# EAGLE board HeadphoneSlice (EAGLE 7.5.0)
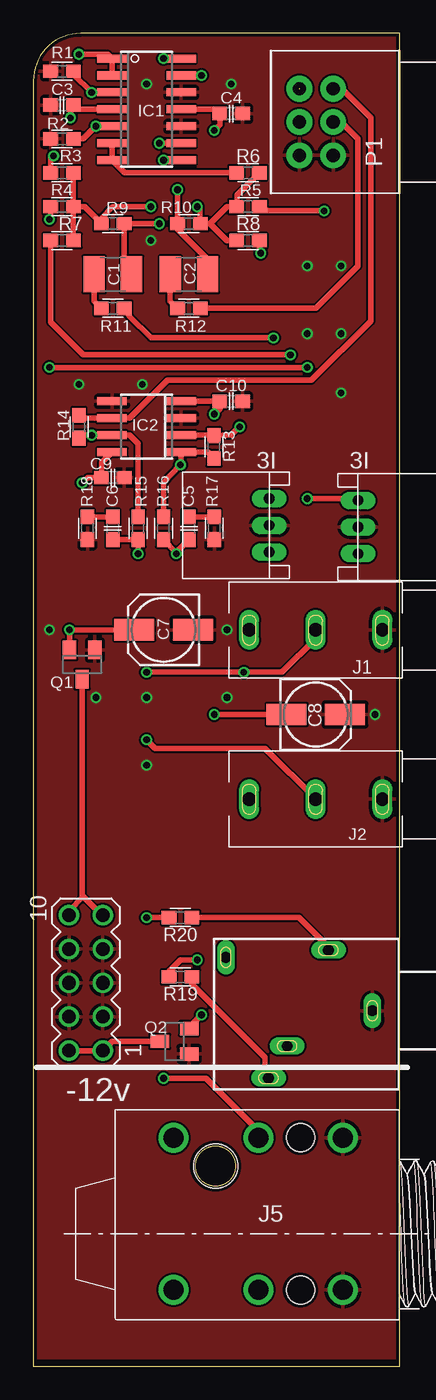
[diagram p0: board, top side]
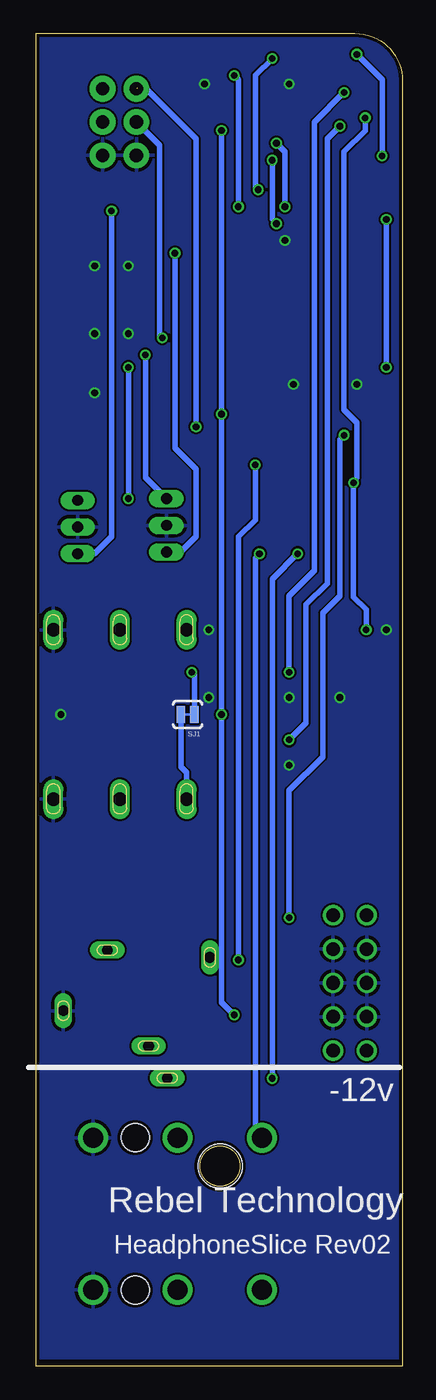
[diagram p1: board, bottom side, seen from below]

Size 27.51 x 100 mm. Coordinates in mm from the lower left corner, seen from the top.
Outline: 27.51,0 27.51,100 3.56,100 arc90 0,96.44 0,0 27.51,0
Copper layers (1*16): Top 0.035mm / dielectric 1.5mm / Bottom 0.035mm
Design rules "SeeedStudio_2layer_DRU_no_angle_20140221": minimum track width 6mil, minimum drill 12mil, track to track 6mil, track to pad 6mil, pad to pad 6mil, via to via 6mil, smd to smd 0mil, copper to edge 10mil, drill to drill 10mil, minimum pad ring 10mil, minimum via ring 6mil, stop-mask expansion 2mil, vias tented up to drill 100mil, thermal gap 10mil

## Footprints (pad centres in the part's own frame; a part is rotated, then mirrored left to right if it is on the bottom)
C1210 = smd 1.6 x 2.7: 1 -1.4,0; 2 1.4,0
C0603 = smd 1.1 x 1: 1 -0.85,0; 2 0.85,0
153CLV-0505 = smd 3 x 1.6: + 2.2,0; - -2.2,0
SO14 = smd 0.6 x 2.2: 1 -3.81,-2.6; 2 -2.54,-2.6; 3 -1.27,-2.6; 4 0,-2.6; 5 1.27,-2.6; 6 2.54,-2.6; 7 3.81,-2.6; 8 3.81,2.6; 9 2.54,2.6; 10 1.27,2.6; 11 0,2.6; 12 -1.27,2.6; 13 -2.54,2.6; 14 -3.81,2.6
SO08 = smd 0.6 x 2.2: 1 -1.905,-2.6; 2 -0.635,-2.6; 3 0.635,-2.6; 4 1.905,-2.6; 5 1.905,2.6; 6 0.635,2.6; 7 -0.635,2.6; 8 -1.905,2.6
UJ-3502-R-SLOT = drill 1 long: P$1 0,0; P$2 0,5; P$3 0,-5
CON-JST_PH_3W = drill 0.8 long: P1 0,0; P2 -2,0; P3 -4,0
NRJ6HF = drill 1.5: R 0,6.35; RN 0,-5.08; S 6.35,6.35; SN 6.35,-5.08; T -6.35,6.35; TN -6.35,-5.08 | hole 2.1: 3.175,6.35; 3.175,-5.08 | hole 3.3: -3.2,4.219
POT-BOURNS-PTD902 = drill 1 pad 1.93: 1 -2.5,-0.036; 2 0,-0.036; 3 2.5,-0.036; 4 -2.5,2.5; 5 0,2.5; 6 2.5,2.5
SOT23 = smd 1 x 1.4: 1 -0.95,-1.1; 2 0.95,-1.1; 3 0,1.1
0603 = smd 1.1 x 1: 1 -0.85,0; 2 0.85,0
SJ_2S-TRACE = smd 0.635 x 1.27: 1 -0.508,0; 2 0.508,0
MA05-2 = drill 1.016: 1 -5.08,-1.27; 2 -5.08,1.27; 3 -2.54,-1.27; 4 -2.54,1.27; 5 0,-1.27; 6 0,1.27; 7 2.54,-1.27; 8 2.54,1.27; 9 5.08,-1.27; 10 5.08,1.27
1503_09 = drill 0.8 pad 1.2 long: 1 0,-2.1; 2 -4.55,-5.4; 3 5.05,-9.9; 4 -4,-13.1; 5 2.65,-8.5

## Placement (x,y rotation side)
C1  1u Polyester  [C1210]  5.97,81.92 180 top
C2  1u Polyester  [C1210]  11.68,81.92 180 top
C3  100n  [C0603]  2.16,94.61 180 top
C4  100n  [C0603]  14.86,93.98 0 top
C5  47n  [C0603]  11.68,62.87 90 top
C6  47n  [C0603]  5.97,62.87 90 top
C7  10u  [153CLV-0505]  9.78,55.24 180 top
C8  10u  [153CLV-0505]  21.21,48.9 0 top
C9  100n  [C0603]  5.97,66.67 0 top
C10  100n  [C0603]  14.86,72.39 0 top
IC1  QUAD_OPAMPD  [SO14]  8.51,94.3 270 top
IC2  RC4560  [SO08]  8.51,70.48 90 top
J1  JACK-UJ-3502-RSLOT  [UJ-3502-R-SLOT]  21.21,55.24 90 top
J2  JACK-UJ-3502-RSLOT  [UJ-3502-R-SLOT]  21.21,42.55 90 top
J3  CON-JST_PH_3W  [CON-JST_PH_3W]  24.38,60.96 270 top
J4  CON-JST_PH_3W  [CON-JST_PH_3W]  17.72,65.09 90 top
J5  NEUTRIK_NRJ6HFSTD  [NRJ6HF]  16.89,10.79 0 top
P1  POT-BOURNS-PTD902  [POT-BOURNS-PTD902]  22.48,93.34 90 top
Q1  SI2309CDS  [SOT23]  3.67,52.64 180 top
Q2  BSS123  [SOT23]  10.6,24.37 90 top
R1  1M  [0603]  2.16,97.16 180 top
R2  1M  [0603]  2.16,92.08 180 top
R3  100k  [0603]  2.16,89.53 180 top
R4  100k  [0603]  2.16,87 180 top
R5  100k  [0603]  16.13,87 0 top
R6  100k  [0603]  16.13,89.53 180 top
R7  100k  [0603]  2.16,84.45 0 top
R8  100k  [0603]  16.13,84.45 0 top
R9  200k  [0603]  5.97,85.72 0 top
R10  200k  [0603]  11.68,85.72 180 top
R11  22k  [0603]  5.97,79.38 180 top
R12  22k  [0603]  11.68,79.38 180 top
R13  10k  [0603]  13.57,68.97 90 top
R14  10k  [0603]  3.43,70.48 90 top
R15  22R  [0603]  7.87,62.87 90 top
R16  22R  [0603]  9.78,62.87 90 top
R17  10R  [0603]  13.59,62.87 90 top
R18  10R  [0603]  4.06,62.87 90 top
R19  100R  [0603]  11.05,29.21 180 top
R20  100R  [0603]  11.05,33.66 180 top
SJ1  SOLDERJUMPERTRACE  [SJ_2S-TRACE]  16.13,48.9 180 bottom
SV1  [MA05-2]  3.95,28.75 90 top
X1  1503_09  [1503_09]  27.56,26.67 270 top

## Library data of the parts
C1-C6 C9 C10 J1-J4 P1 R1-R20 = Rebel
C7 C8 = rcl
IC1 = adafruit
IC2 = linear
J5 = neutrik_jacks
Q1 Q2 = transistor-small-signal
SJ1 = SparkFun
SV1 = con-lstb; OC_FARNELL: unknown; OC_NEWARK: unknown
X1 = con-lumberg; OC_FARNELL: 1243244; OC_NEWARK: unknown

## Nets
+12V: C3.1 C7.+ C9.1 IC1.4 IC2.8 Q1.2
-12V: C4.1 C8.- C10.1 IC1.11 IC2.4 Q2.2
BUS_IN_L: J3.P3 R4.2
BUS_IN_R: J3.P1 R5.2
GND: C3.2 C4.2 C7.- C8.+ C9.2 C10.2 IC1.10 IC1.12 IC2.3 IC2.5 J1.P$3 J2.P$3 J3.P2 J4.P2 J5.S J5.SN P1.1 P1.4 Q1.1 Q2.1 R1.2 R2.2 R17.1 R18.1 SV1.3 SV1.4 SV1.5 SV1.6 SV1.7 SV1.8 X1.1
HP_L: C5.1 J5.T R16.1
HP_R: C6.1 J5.R R15.1
IN_B1: J2.P$2 SJ1.2
IN_L: IC1.3 J1.P$1 R1.1 SJ1.1
IN_R: IC1.5 J2.P$1 R2.1
LINE_L: R19.1 X1.3
LINE_R: R20.1 X1.2
N$1: Q2.3 SV1.1 SV1.2
N$2: IC2.7 R14.1 R15.2 R20.2
N$3: IC2.2 P1.6 R13.2
N$4: C2.2 R12.2
N$5: P1.5 R11.1
N$6: P1.2 R12.1
N$7: C2.1 IC1.14 R10.2
N$8: C1.2 R11.2
N$10: C1.1 IC1.8 R9.2
N$11: IC1.6 IC1.7 R6.2
N$12: C6.2 R18.2
N$13: IC1.1 IC1.2 R3.2
N$14: Q1.3 SV1.9 SV1.10
N$16: IC2.6 P1.3 R14.2
N$19: IC2.1 R13.1 R16.2 R19.2
N$20: J4.P1 R7.1
N$21: C5.2 R17.2
N$22: J4.P3 R8.2
N$45: IC1.13 R5.1 R6.1 R8.1 R10.1
N$50: IC1.9 R3.1 R4.1 R7.2 R9.1

## Tracks (layer width: path | path; a pad name or v marks a point on that pad's centre or on a via)
+12V  (via drill 0.5)
  Top 0.406: Q1.2 v2.72,55.24 C7.+ | IC2.8 5.12,67.79 C9.1 4.06,66.67 v3.67,66.28 | IC1.4 3.33,94.3 C3.1 2.79,94.4 v2.79,93.66
  Bottom 0.406: v2.79,93.66 2.79,92.71 4.38,91.12 4.38,71.75 3.43,70.8 3.43,66.67 v3.67,66.28 3.67,57.71 2.72,56.76 v2.72,55.24
-12V  (via drill 0.5)
  Top 0.406: IC2.4 C10.1 14.01,71.86 v13.59,71.44 | Q2.2 11.7,25.42 v12.64,26.35 | C8.- v13.59,48.9 | IC1.11 13.69,94.3 C4.1 14.01,93.13 v13.59,92.71
  Bottom 0.406: v13.59,92.71 v13.59,71.44 v13.59,48.9 13.59,27.3 v12.64,26.35
BUS_IN_L  (via drill 0.5)
  Top 0.406: R4.2 1.31,86.14 v1.21,86.04 | v1.21,74.93 v20.57,74.93 | v20.57,65.09 24.26,65.09 J3.P3
  Bottom 0.406: v1.21,74.93 v1.21,86.04 | v20.57,74.93 v20.57,65.09
BUS_IN_R  (via drill 0.5)
  Top 0.406: v21.84,86.68 17.61,86.68 R5.2
  Bottom 0.406: v21.84,86.68 21.84,62.23 23.11,60.96 J3.P1
GND  (via drill 0.5)
  other vias: 8.51,45.09 4.7,50.16 14.54,55.24 8.83,84.45 20.57,77.47 1.21,55.24 20.57,82.55 3.43,73.66 8.51,50.16 14.54,50.16 25.65,48.9 8.19,73.66 8.51,96.2 23.11,77.47 23.11,73.03 23.11,82.55 14.86,96.2
  pour Bottom: -9.27,0.64 35.18,0.64 35.18,100.97 -9.27,100.97
  pour Top: -8,0.64 36.45,0.64 36.45,100.97 -8,100.97
HP_L  (via drill 0.5)
  Top 0.406: v10.73,60.96 10.73,61.06 | 10.73,61.06 R16.1 | 10.73,61.06 C5.1
  Bottom 0.406: v10.73,60.96 11.05,60.64 11.05,17.78 10.54,17.27 J5.T
HP_R  (via drill 0.5)
  Top 0.406: C6.1 R15.1 v7.87,60.96 | J5.R 16.89,17.65 12.95,21.59 v9.78,21.59
  Bottom 0.406: v7.87,60.96 9.78,59.05 v9.78,21.59
IN_B1
  Bottom 0.406: SJ1.2 16.64,44.96 16.21,44.53 J2.P$2
IN_L  (via drill 0.5)
  Top 0.406: R1.1 3.01,96.94 v4.38,95.57 IC1.3 | v8.51,52.07 v15.81,52.07 18.67,52.07 21.21,54.61 J1.P$1
  Bottom 0.406: v8.51,52.07 8.51,57.78 6.6,59.69 6.6,93.34 v4.38,95.57 | SJ1.1 15.62,51.88 v15.81,52.07
IN_R  (via drill 0.5)
  Top 0.406: R2.1 3.75,92.08 v4.7,93.03 IC1.5 | v8.51,46.99 9.14,46.35 17.4,46.35 J2.P$1
  Bottom 0.406: v8.51,46.99 7.24,48.26 7.24,57.15 5.65,58.74 5.65,92.08 v4.7,93.03
LINE_L
  Top 0.406: 11.9,29 R19.1 11.9,28.68 17.4,23.18 17.4,22.2 X1.3
LINE_R
  Top 0.406: R20.1 19.94,33.66 22.37,31.22 X1.2
N$1
  Top 0.406: SV1.2 SV1.1 5.91,24.37 Q2.3
N$2  (via drill 0.5)
  Top 0.406: R14.1 3.64,69.85 v4.38,69.85 IC2.7 7.24,69.85 7.87,69.22 R15.2 | v8.51,33.66 R20.2
  Bottom 0.406: v4.38,69.85 4.7,69.53 4.7,57.78 5.97,56.52 5.97,45.72 8.51,43.18 v8.51,33.66
N$3  (via drill 0.5)  (1 unrouted)
  Top 0.406: IC2.2 13.53,69.85 R13.2 14.24,69.85 14.86,69.85 v15.49,70.48
  Bottom 0.406: v15.49,70.48 15.49,92.08 19.3,95.89 19.94,95.89
N$4
  Top 0.406: C2.2 10.28,79.92 R12.2
N$5  (via drill 0.5)
  Top 0.406: v18.03,77.15 8.83,77.15 7.24,78.74 R11.1
  Bottom 0.406: v18.03,77.15 18.22,77.28 18.22,91.59 P1.5
N$6
  Top 0.406: R12.1 21.21,79.38 24.38,82.55 24.38,92.08 23.11,93.34 P1.2
N$7  (via drill 0.5)
  Top 0.406: v9.78,98.11 IC1.14 | v10.83,88.27 R10.2 10.83,85.31 13.08,83.06 C2.1
  Bottom 0.406: v10.83,88.27 11.05,88.48 11.05,96.84 v9.78,98.11
N$8
  Top 0.406: C1.2 4.57,79.92 R11.2
N$10  (via drill 0.5)
  Top 0.406: IC1.8 v9.78,90.49 | v9.46,85.72 R9.2 6.82,82.47 C1.1
  Bottom 0.406: v9.78,90.49 9.78,86.04 v9.46,85.72
N$11
  Top 0.406: IC1.6 IC1.7 6.86,89.53 R6.2
N$12
  Top 0.406: C6.2 R18.2
N$13  (via drill 0.5)
  Top 0.406: IC1.2 IC1.1 5.59,98.42 v3.43,98.42 | R3.2 1.31,90.59 v1.52,90.81
  Bottom 0.406: v1.52,90.81 1.52,96.52 v3.43,98.42
N$14
  Top 0.406: SV1.9 5.15,33.84 3.75,35.24 | 3.75,35.24 3.67,35.32 Q1.3 | SV1.10 2.68,34.17 3.75,35.24
N$16
  Top 0.406: R14.2 3.33,71.12 IC2.6 7.24,71.12 10.1,73.98 20.89,73.98 25.34,78.42 25.34,93.66 23.15,95.84 P1.3
N$19  (via drill 0.5)
  Top 0.406: R13.1 13.1,68.58 IC2.1 11.11,67.69 v11.05,67.63 10.99,67.57 9.78,66.3 R16.2 | v12.32,30.48 11.05,30.48 10.2,29.63 R19.2
  Bottom 0.406: v11.05,67.63 11.05,63.5 12.32,62.23 v12.32,30.48
N$20  (via drill 0.5)
  Top 0.406: R7.1 1.31,78.32 3.75,75.88 v19.3,75.88
  Bottom 0.406: v19.3,75.88 19.3,66.67 J4.P1
N$21
  Top 0.406: R17.2 C5.2
N$22  (via drill 0.5)
  Top 0.406: R8.2 16.98,83.61 v17.08,83.5
  Bottom 0.406: v17.08,83.5 17.08,68.9 15.49,67.31 15.49,62.23 16.76,60.96 17.59,60.96 J4.P3
N$45  (via drill 0.5)
  Top 0.406: R6.1 16.98,89.55 15.28,87.84 R5.1 14.54,87 13.27,85.72 | 13.27,85.72 R10.1 12.53,86.78 v12.32,87 | 13.27,85.72 14.54,84.45 R8.1 | v12.64,96.84 IC1.13
  Bottom 0.406: v12.32,87 12.32,96.52 v12.64,96.84
N$50  (via drill 0.5)
  Top 0.406: R3.1 R4.1 | v8.83,87 5.97,87 5.12,86.14 R9.1 3.85,87 R4.1 | v9.46,91.76 IC1.9 | R7.2 R4.1
  Bottom 0.406: v8.83,87 8.83,91.12 v9.46,91.76

## Text on the board
tPlace: 3I | 3I | -12v
bPlace: -12v | Rebel Technology | HeadphoneSlice Rev02